# Altium PCB NEW_PCB.pcbdoc
Units mm, origin at the board's own origin, x right, y up, seen from the top; angles counter-clockwise.
Board outline 146.18 x 138.43 mm, 2 copper layers (Top Layer, Bottom Layer); 21 components, 50 nets, 89 pads, 22 vias.
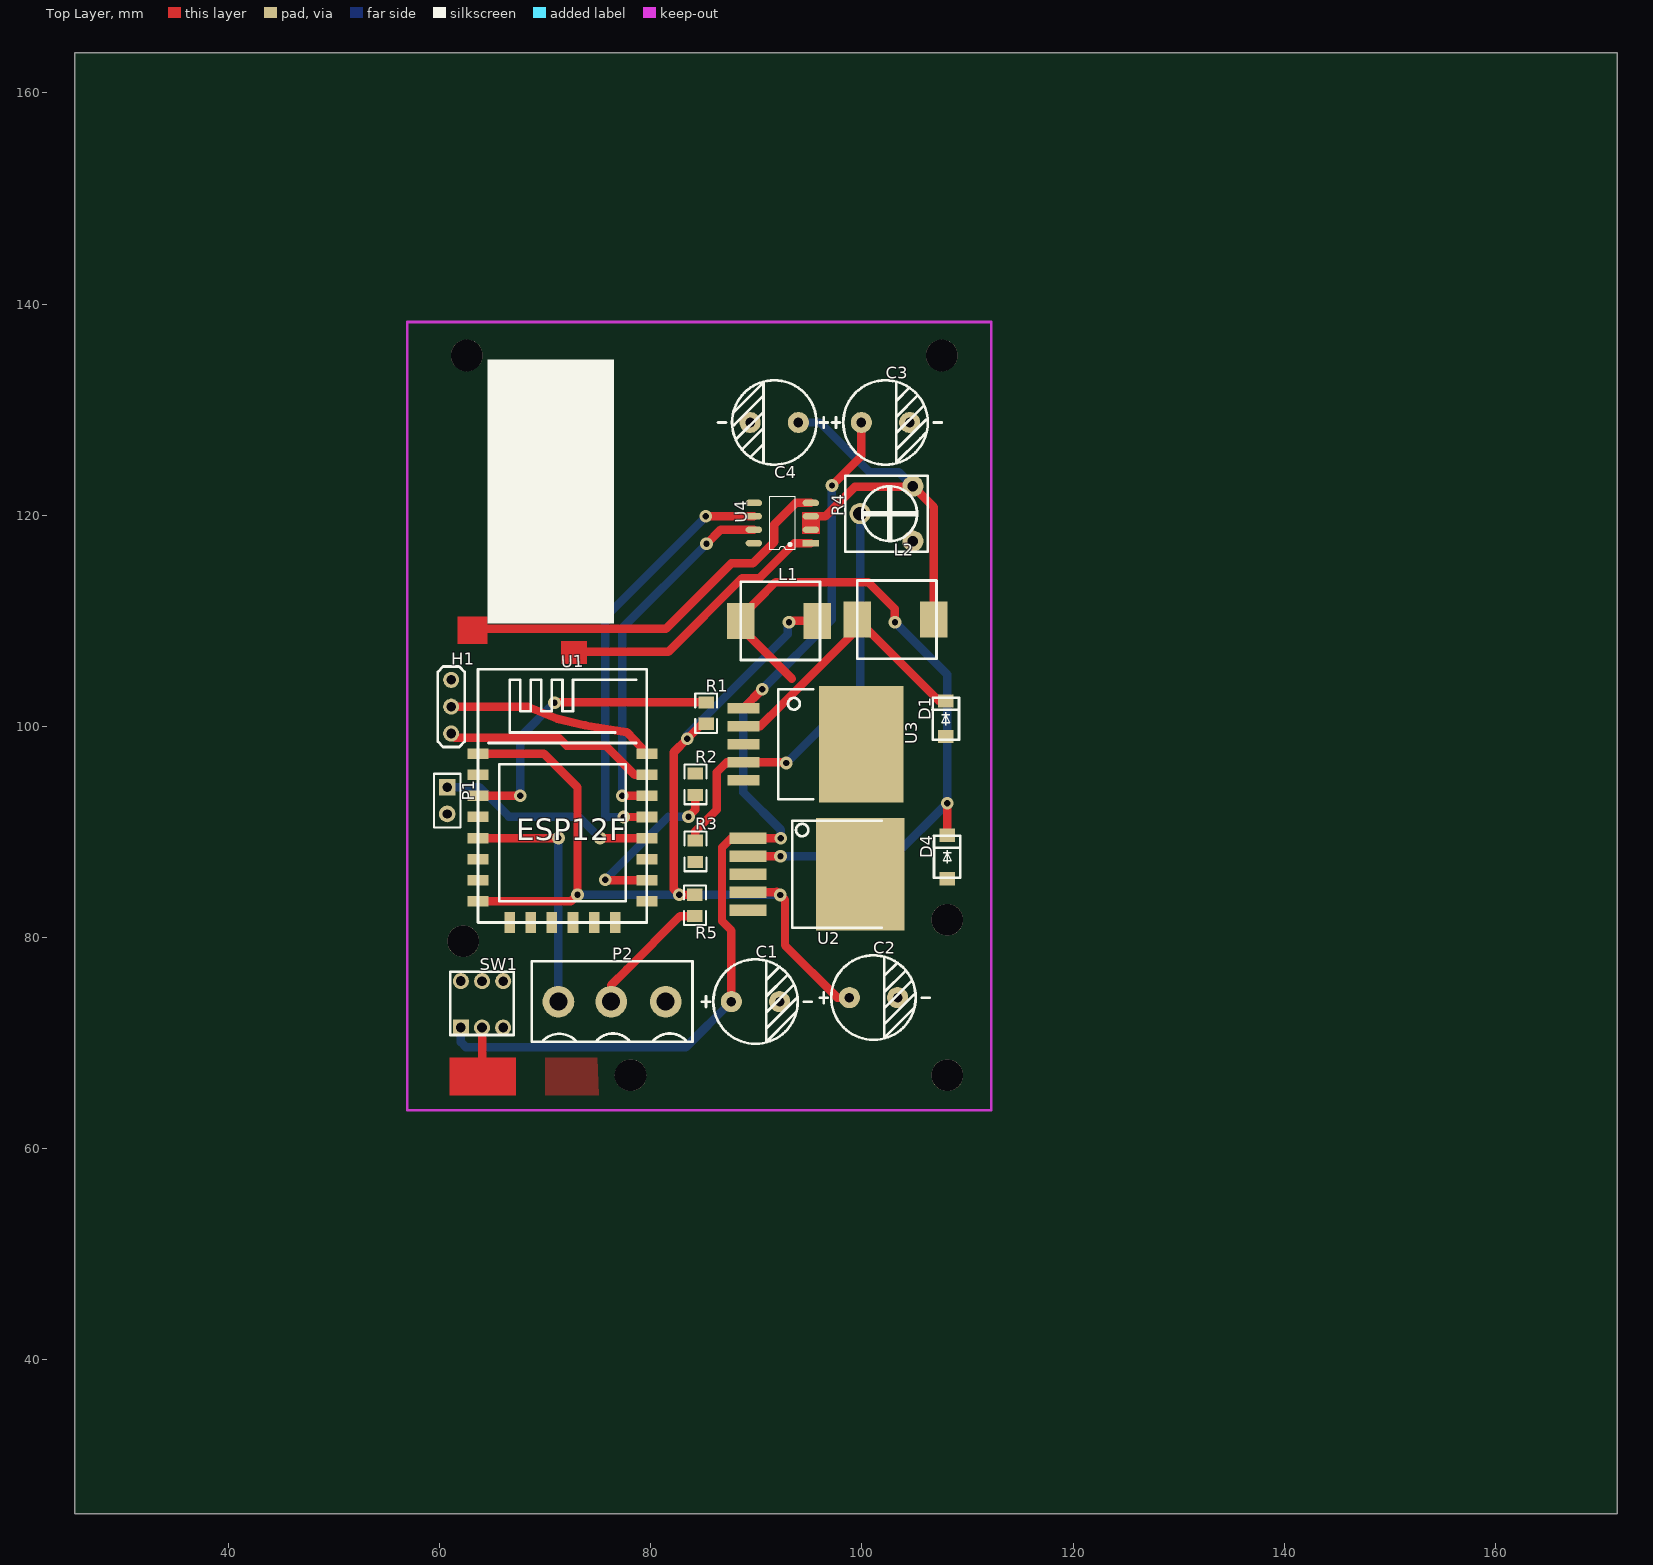
[diagram p0: Top Layer view]
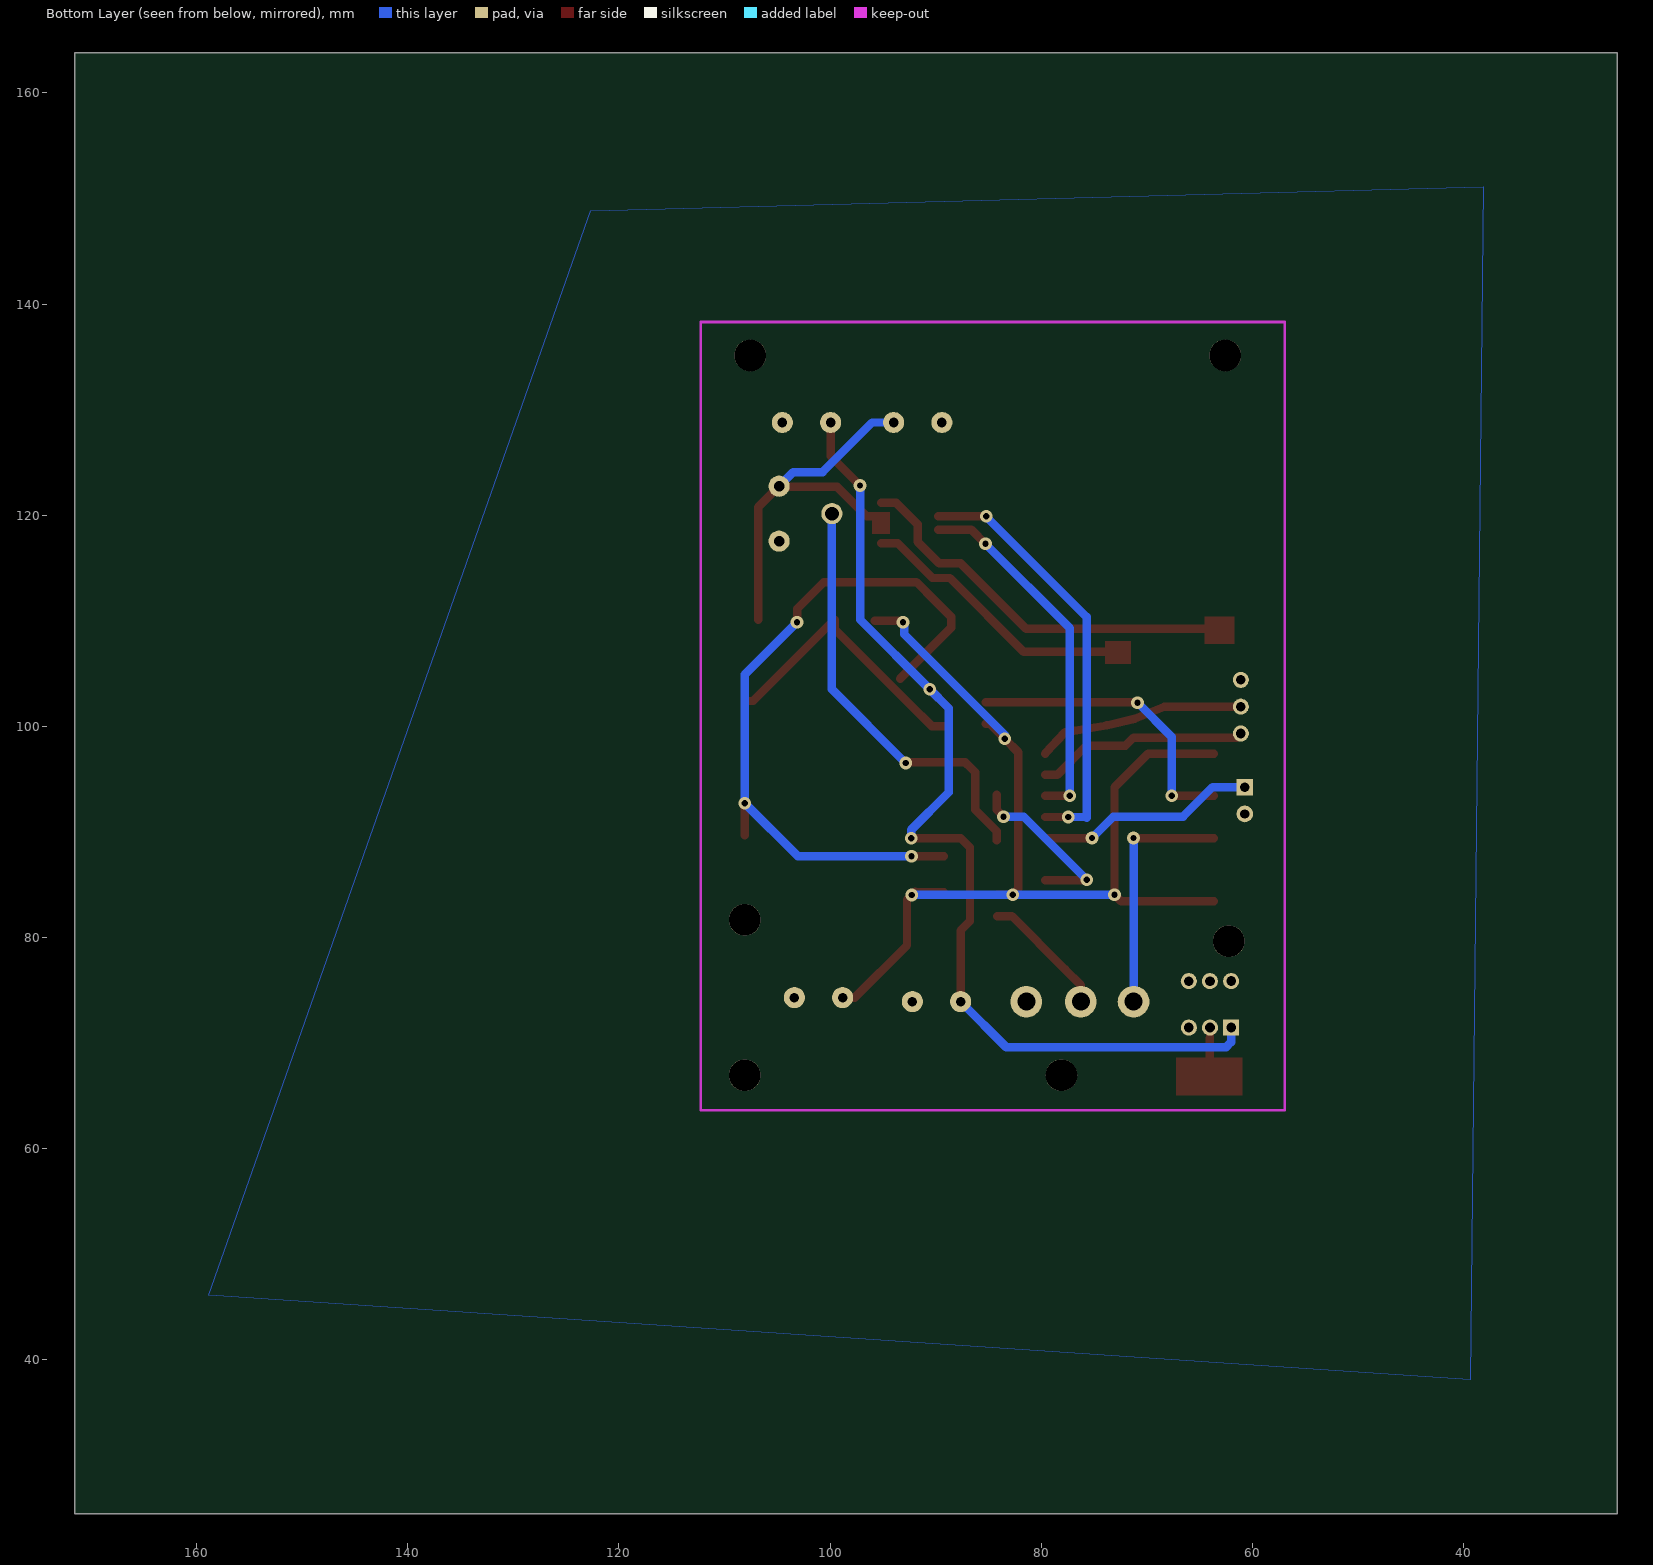
[diagram p1: Bottom Layer view, seen from below]

## Layer stack, top to bottom
Top Layer: signal copper (thickness not stored)
Dielectric: dielectric 0.32, FR-4, Dk 4.8
Bottom Layer: signal copper (thickness not stored)

## Board outline
171.577,25.4 25.4,25.4 25.4,163.83 171.577,163.83

## Components (designator, comment, footprint, x,y, rotation, side; value= is the part's Value field where it differs from the comment)
C1 "680uF" 8*12电解电容 87.63,73.914 r0 top
C2 "220uF" 8*12电解电容 98.806,74.295 r0 top
C3 "680u" 8*12电解电容 99.949,128.778 r0 top
C4 "220u" 8*12电解电容 93.98,128.778 r180 top
D1 "ss34" SMA/DO-214AC 107.95,100.711 r90 top
D4 "SS34" SMA(DO-214AC) 108.077,87.63 r90 top
H1 "串口" 排针*3 59.817,105.664 r0 top
L1 "33uH" 7.5*7.5贴片电感 88.519,109.982 r0 top
L2 "68u" 7.5*7.5贴片电感 99.568,110.109 r0 top
P1 "Header-Female-2.54_1x2" HDR-1X2/2.54 60.706,92.964 r270 top
P2 "WJ2EDGVC-5.08-3P" WJ2EDGVC-5.08-3P 76.327,73.914 r0 top
R1 "1k" 0805 85.217,101.219 r0 top
R2 "1k" 0805 84.201,94.488 r0 top
R3 "10k" 0805 84.201,88.138 r0 top
R4 "100k" 卧式电位器 99.822,120.142 r90 top
R5 "1k" 0805 84.201,83.058 r180 top
SW1 "K8-5851E-N1" KEY-6X6 64.008,73.66 r0 top
U1 "esp8266" ESP-12F(ESP8266MOD) 71.628,89.408 r0 top
U2 "LM2596S-3.3/TR" TO-263-5 89.662,85.979 r180 top
U3 "LM2596S-ADJ" TO263-5 96.774,98.298 r270 top
U4 "L9110S" SOP8 92.456,119.253 r90 top

## Footprints (in the part's own frame and the unit in brackets; to place one, negate y for a bottom-side part, rotate by r counter-clockwise, add the part's x,y. Pads: shape width x height; smd on the part's side, far side on the other; paste and mask are expansions set on the pad)
7.5*7.5贴片电感 [mm]
  rect 2.6x3.4 smd: 1(0,0) 2(7.25,0)
  silkscreen extent 0,-3.7 7.5,3.7
8*12电解电容 [mm]
  round 2 hole 0.914: 1(0,0) 2(4.572,0)
  silkscreen extent -2.79,-4 7.62,4
0805 [mil]
  rect 57.87x45.67 smd: 1(1,-39) 2(1,41)
  silkscreen extent -40,-74 42,75
ESP-12F(ESP8266MOD) [mm]
  rect 2x1 smd: 1(-8.002,8) 2(-8.002,6) 3(-8.002,4.001) 4(-8.002,2.001) 5(-8.002,0) 6(-8.002,-1.999) 7(-8.002,-3.999) 8(-8.001,-5.999) 15(7.999,-6.005) 16(8,-4.001) 17(8.002,-2.003) 18(8.001,-0.002) 19(8,1.998) 20(8.001,3.998) 21(8,5.998) 22(8.001,7.998)
  rect 1x2 smd: 9(-5,-8) 10(-3.002,-7.999) 11(-1.003,-7.999) 12(0.998,-7.999) 13(2.997,-7.999) 14(4.997,-8)
  silkscreen extent -8,-8 8,16
HDR-1X2/2.54 [mil]
  rect 62x62 hole 35: 1(-50,0)
  round 62 hole 35: 2(50,0)
  silkscreen extent -100,-49 100,50
KEY-6X6 [mil]
  rect 60x60 hole 36: 1(-78.9,-86.75)
  round 60 hole 36: 2(-0.1,-86.75) 3(78.6,-86.75) 4(-79,86.75) 5(0.1,86.45) 6(79,86.45)
  silkscreen extent -118,-114 118,122
SMA(DO-214AC) [mil]
  rect 50x57.9 smd: 1(-81,0) 2(81,0)
  silkscreen extent -78,-49 79,49
SMA/DO-214AC [mm]
  rect 1.27x1.471 smd: 1(-1.684,0) 2(1.684,0)
  silkscreen extent -2,-1.27 2,1.27
SOP8 [mil]
  rect 24x61 smd: 1(-75,-106.3)
  oval 24x61 smd: 2(-25,-106.3) 3(25,-106.3) 4(75,-106.3) 5(75,106.3) 6(25,106.3) 7(-25,106.3) 8(-75,106.3)
  silkscreen extent -100,-47 100,47
TO263-5 [mil]
  rect 39.4x118.1 smd: 1(-134,-315) 2(-67,-315) 3(0,-315) 4(67,-315) 5(134,-315)
  rect 433.1x315 smd: TAB(0,125)
  silkscreen extent -205,-185 205,-55
TO-263-5 [mil]
  rect 137.79x42.1 smd: 1(18,-134) 2(18,-67) 3(18,0) 4(18,67) 5(18,134)
  rect 329.92x419.68 smd: 6(-400,0)
  silkscreen extent -480,-200 -147,200
WJ2EDGVC-5.08-3P [mm]
  round 3 hole 1.7: 1(-5.08,0) 2(-0.081,0) 3(5.08,0)
  silkscreen extent -7.62,-3.81 7.62,3.81
卧式电位器 [mm]
  round 2 hole 1: 1(-2.6,-5) 3(2.6,-5)
  round 2 hole 1.3: 2(0,0)
  silkscreen extent -3.6,-6.4 3.6,1.4
排针*3 [mil]
  round 60 hole 36: 1(50,-50) 2(50,-150) 3(50,-250)
  silkscreen extent 0,-300 100,0

## Free pads (board coordinates)
  round 3 hole 3 unplated: ""(62.23,79.629) ""(62.569,135.128) ""(78.077,66.929) ""(107.569,135.128) ""(108.077,66.929) ""(108.077,81.661)

## Via types
v1: diameter 1.2, hole 0.6, Top Layer to Bottom Layer, 22 vias

## Nets (pads, with @x,y where several pads share a name; then routed paths per layer and width w, separated by ;. In a path a pad name is that pad's centre, name@x,y a point inside that pad or via, vN(x,y) a via of type N, cw(c..) or ccw(c..) an arc to the next point about the centre after c; other vN are vias at no path point)
3.3V: C2.1 L1.2 R1.1 R5.1 U1.1 U1.8 U2.4 | length 103.4
  Top Layer w0.8: U1.8 72.41,83.409 v1(73.05,84.049) 73.05,94.209 73.025,94.234 69.851,97.408 U1.1 ; v1@82.677,84.074 v1(82.702,84.049) ; R5.1 v1(82.702,84.049) ; R1.1 84.861,100.228 v1(83.439,98.806) 82.169,97.536 82.169,84.582 v1(82.702,84.049) ; U2.4 91.897,84.277 91.948,84.328 v1(92.266,84.01) 92.71,83.566 92.71,79.248 97.663,74.295 C2.1 ; v1(93.091,109.855) 93.218,109.982 L1.2
  Bottom Layer w0.8: v1@73.025,84.074 v1(73.05,84.049) v1(82.702,84.049) 92.227,84.049 v1(92.266,84.01) ; v1(83.439,98.806) 83.439,99.187 92.96,108.708 92.96,109.724 v1(93.091,109.855)
7.2V: C1.1 C3.1 SW1.1 U2.1 U3.1 | length 98
  Top Layer w0.8: C1.1 87.63,80.645 86.741,81.534 86.741,88.519 87.605,89.383 U2.1 v1(92.304,89.383) v1@92.329,89.408 ; U3.1 88.773,101.727 v1(90.551,103.505) ; v1(97.155,122.809) 99.949,125.603 C3.1
  Bottom Layer w0.8: SW1.1 62.004,70.076 62.484,69.596 83.312,69.596 C1.1 ; v1(92.304,89.383) 92.304,90.195 88.773,93.726 88.773,101.727 v1(90.551,103.505) 97.155,110.109 v1(97.155,122.809)
BUTTON: P2.1 U1.5 | length 23.1
  Top Layer w0.8: U1.5 v1(71.247,89.408)
  Bottom Layer w0.8: P2.1 v1(71.247,89.408)
GND: C1.2 C2.2 C3.2 C4.2 D1.1 D4.1 H1.1 P1.2 P2.3 R2.2 R3.1 U1.15 U2.3 U2.5 U2.6 U3.3 U3.5 U3.TAB U4.5 U4.8
INA: U1.20 U4.7 | length 34.7
  Top Layer w0.8: v1@77.216,93.345 v1(77.277,93.406) U1.20 ; v1(85.281,117.284) 86.614,118.618 U4.7
  Bottom Layer w0.8: v1(77.277,93.406) 77.277,109.281 v1(85.281,117.284)
INB: U1.19 U4.6 | length 41
  Top Layer w0.8: v1(77.436,91.406) U1.19 ; v1(85.217,119.888) U4.6
  Bottom Layer w0.8: v1(77.436,91.406) 75.786,91.407 75.692,91.313 75.692,110.363 v1(85.217,119.888)
P2_2: P2.2 R5.2 | length 12.2
  Top Layer w0.8: P2.2 76.246,75.484 77.724,76.962 82.779,82.017 R5.2
R4_1: R4.1
S$12: 
S$13: 
S$15: 
S$21: 
S$23: 
S$26: 
S$28: 
S$30: 
S$32: 
S$33: 
S$35: 
S$38: 
S$40: 
S$42: 
S$44: 
SW1_3: SW1.3
SW1_4: SW1.4
SW1_5: SW1.5
SW1_6: SW1.6
U1_2: U1.2
U1_3: R1.2 U1.3 | length 28.6
  Top Layer w0.8: U1.3 v1(67.627,93.409) v1@67.691,93.345 ; v1(70.866,102.235) 70.891,102.26 R1.2
  Bottom Layer w0.8: v1(67.627,93.409) 67.627,98.996 v1(70.866,102.235)
U1_4: U1.4
U1_6: U1.6
U1_7: U1.7
U1_9: U1.9
U1_10: U1.10
U1_11: U1.11
U1_12: U1.12
U1_13: U1.13
U1_14: U1.14
U1_16: R2.1 U1.16 | length 16.6
  Top Layer w0.8: v1(75.692,85.471) 75.756,85.407 U1.16 ; v1(83.566,91.44) 84.226,92.1 R2.1
  Bottom Layer w0.8: v1(75.692,85.471) 81.661,91.44 v1(83.566,91.44)
U1_17: U1.17
U1_18: P1.1 U1.18 | length 20.9
  Top Layer w0.8: v1(75.184,89.408) 75.186,89.406 U1.18
  Bottom Layer w0.8: P1.1 63.754,94.234 66.548,91.44 73.152,91.44 v1(75.184,89.408)
U1_21: H1.3 U1.21 | length 20.2
  Top Layer w0.8: H1.3 61.468,98.933 71.247,98.933 72.009,98.171 75.692,98.171 78.457,95.406 U1.21
U1_22: H1.2 U1.22 | length 19.8
  Top Layer w0.8: H1.2 68.326,101.854 71.12,100.711 73.787,100.076 77.724,99.441 U1.22
U2_2: D4.2 L1.1 U2.2 | length 69.4
  Top Layer w0.8: U2.2 v1(92.278,87.681) v1@92.329,87.63 ; 93.345,104.521 88.519,109.347 L1.1 88.519,110.363 90.043,111.887 91.821,113.665 100.584,113.665 103.124,111.125 v1(103.124,109.855) ; D4.2 v1(108.077,92.71)
  Bottom Layer w0.8: v1(92.278,87.681) 103.048,87.681 v1(108.077,92.71) 108.077,104.902 v1(103.124,109.855)
U3_2: D1.2 L2.1 U3.2 | length 27.1
  Top Layer w0.8: U3.2 90.348,100 92.456,102.108 99.568,109.22 L2.1 107.282,102.395 D1.2
U3_4: R3.2 R4.2 U3.4 | length 40.8
  Top Layer w0.8: R3.2 84.226,90.068 86.233,92.075 86.233,95.631 86.614,96.012 87.198,96.596 U3.4 92.761,96.596 v1(92.837,96.52)
  Bottom Layer w0.8: v1(92.837,96.52) 99.822,103.505 R4.2
U4_1: U4.1 | length 25.4
  Top Layer w0.8: 74.041,107.061 81.661,107.061 88.646,114.046 90.297,114.046 93.599,117.348 U4.1
U4_4: U4.4 | length 37.3
  Top Layer w0.8: 63.754,109.22 81.407,109.22 87.63,115.443 89.662,115.443 91.694,117.475 91.694,119.126 93.726,121.158 U4.4
VCC: SW1.2 | length 3.4
  Top Layer w0.8: SW1.2 64.008,69.723 64.008,68.707 64.008,68.072
VOUT: C4.1 L2.2 R4.3 U4.2 U4.3 | length 37.7
  Top Layer w0.8: U4.3 96.52,119.888 99.314,122.682 104.762,122.682 R4.3 106.818,120.746 L2.2
  Bottom Layer w0.8: C4.1 96.012,128.778 100.711,124.079 103.485,124.079 R4.3

## Polygon pours and split planes (outlines as drawn)
GND on Bottom Layer (solid): 38.1,151.13 39.37,38.1 158.877,46.101 122.682,148.844
GND on Top Layer (solid): 51.943,145.542 51.562,56.261 119.253,58.039 117.729,144.145

## Other copper
Top Layer:
  region net VOUT: 94.361,120.269 94.361,118.237 96.012,118.237 96.012,120.269
  region net VCC: 60.96,68.58 67.183,68.58 67.183,65.024 60.96,65.024 60.96,66.675
  region net U4_4: 61.722,110.363 61.722,107.823 64.516,107.823 64.516,110.363
  region net U4_1: 73.914,108.077 71.501,108.077 71.501,105.918 73.914,105.918

## Silkscreen, mask and mechanical layers (free items; w line width, h text height)
Top Overlay:
  rectangle: 64.516,109.747 76.516,134.747
Top Paste:
  region: 62.23,67.945 62.23,65.786 66.04,65.659 66.04,67.945
  region: 70.866,67.945 70.866,65.532 74.168,65.532 74.168,67.945 73.66,67.945
  region: 61.722,110.363 61.722,107.823 64.516,107.823 64.516,110.363
  region: 71.501,108.077 71.501,105.918 73.914,105.918 73.914,108.077
Top Solder:
  region: 66.04,65.659 62.23,65.786 62.23,67.945 66.04,67.945
  region: 70.866,67.945 70.866,65.532 74.168,65.532 74.168,67.945
  region: 61.722,110.363 61.722,107.823 64.516,107.823 64.516,110.363
  region: 71.501,108.077 71.501,105.918 73.914,105.918 73.914,108.077

## Text inside footprints (layer, text, board x,y; h text height)
U1: Top Overlay "ESP12F" at 67.226,89.192 h2.03